# EAGLE board PCB Telemetria 2020 (EAGLE 9.5.2)
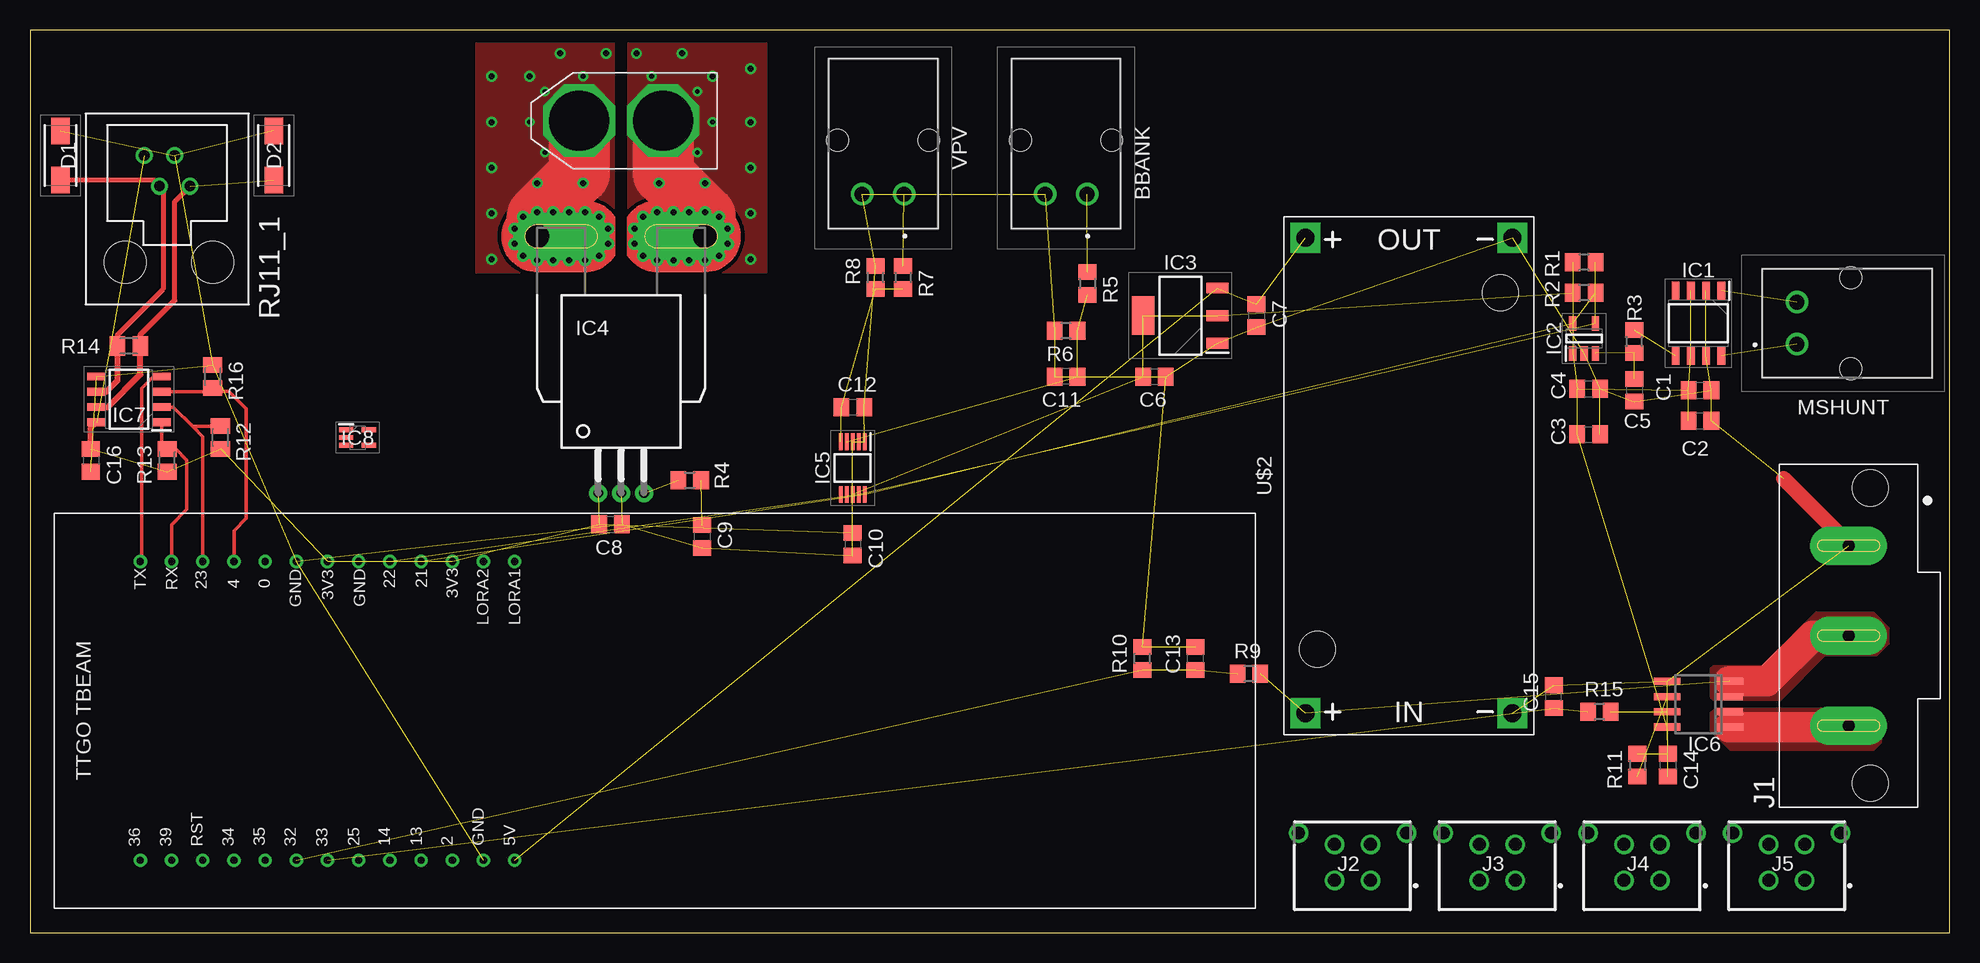
[diagram p0: board, top side]
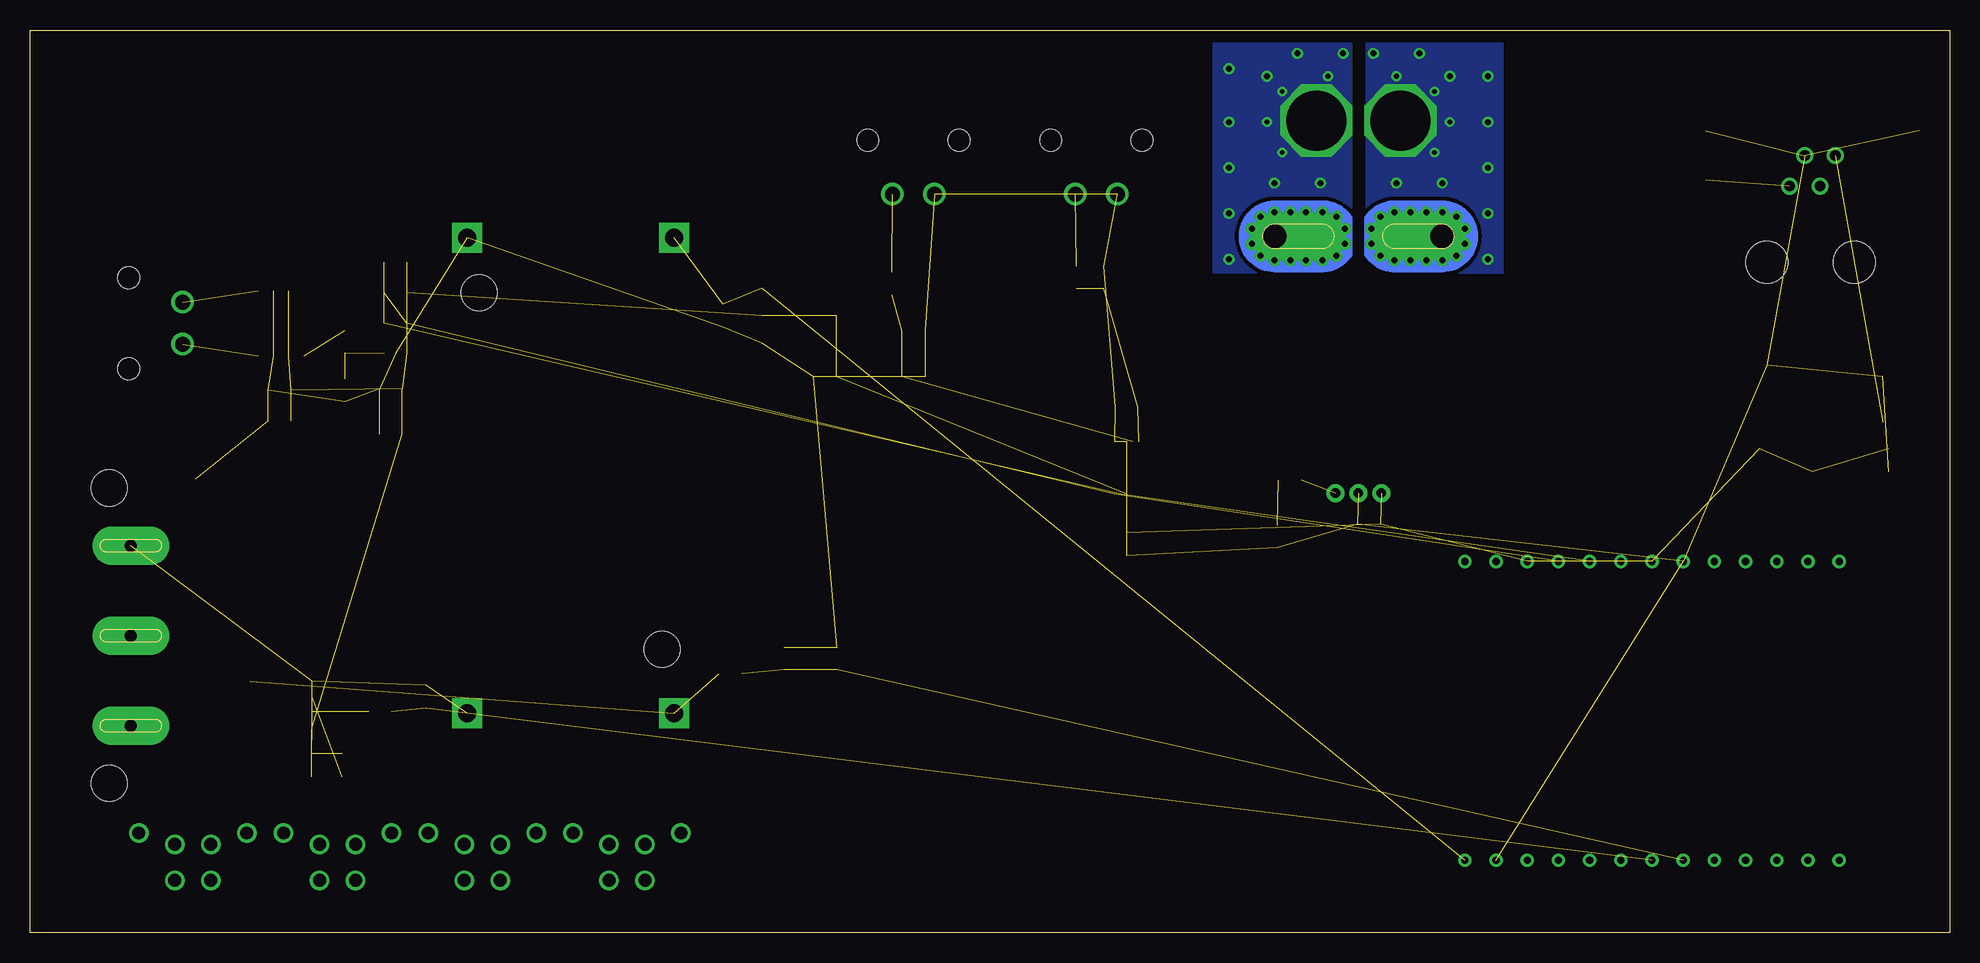
[diagram p1: board, bottom side, seen from below]

Size 160 x 75.23 mm. Coordinates in mm from the lower left corner, seen from the top.
Outline: 0,0 160,0 160,75.23 0,75.23 0,0
Copper layers (1*16): Top 0.035mm / dielectric 1.5mm / Bottom 0.035mm
Design rules "default *": minimum track width 6mil, minimum drill 0.35mm, track to track 12mil, track to pad 16mil, pad to pad 5mil, via to via 16mil, smd to smd 6mil, copper to edge 40mil, drill to drill 6mil, minimum pad ring 10mil, minimum via ring 8mil, stop-mask expansion 4mil, vias tented up to drill 0mil, thermal gap 10mil

## Footprints (pad centres in the part's own frame; a part is rotated, then mirrored left to right if it is on the bottom)
0532590229 = drill 1.25 pad 1.875: 1 -1.75,3.85; 2 1.75,3.85 | hole 1.8: 3.8,-0.65; -3.8,-0.65
C0805 = smd 1.3 x 1.5: 1 -0.95,0; 2 0.95,0
DIONM5026X229N = smd 2.2 x 1.55: 1 -2.05,0; 2 2.05,0
SOIC127P600X175-8N = smd 1.528 x 0.65: 1 -2.711,1.905; 2 -2.711,0.635; 3 -2.711,-0.635; 4 -2.711,-1.905; 5 2.711,-1.905; 6 2.711,-0.635; 7 2.711,0.635; 8 2.711,1.905
SOT95P280X145-5N = smd 1.2 x 0.6: 1 -1.25,0.95; 2 -1.25,0; 3 -1.25,-0.95; 4 1.25,-0.95; 5 1.25,0.95
SOT230P700X170-4N = smd 1.85 x 0.9: 1 -3.1,2.3; 2 -3.1,0; 3 -3.1,-2.3 | smd 1.85 x 3.2: 4 3.1,0
CB-PFF = drill 0.8 pad 1.5: 1 -1.91,-21.4; 2 0,-21.4; 3 1.91,-21.4 | drill 2 pad 4 offset: IP+ 7,0; IP- -7,0 | drill 0.5 pad 0.9: IP+@2 8.89,0.635; IP+@3 8.89,-0.635; IP+@4 8.175,-1.625; IP+@5 7,-2; IP+@6 5.675,-2; IP+@7 4.35,-2; IP+@8 3,-2; IP+@9 1.825,-1.625; IP+@10 1.1,-0.625; IP+@11 1.1,0.625; IP+@12 1.825,1.625; IP+@13 3,2; IP+@14 4.35,2; IP+@15 5.675,2; IP+@16 7,2; IP+@17 8.175,1.625; IP-@2 -8.89,0.635; IP-@3 -8.89,-0.635; IP-@4 -8.175,-1.625; IP-@5 -7,-2; IP-@6 -5.675,-2; IP-@7 -4.325,-2; IP-@8 -3,-2; IP-@9 -1.825,-1.625; IP-@10 -1.1,-0.625; IP-@11 -1.1,0.625; IP-@12 -1.825,1.625; IP-@13 -3,2; IP-@14 -4.325,2; IP-@15 -5.675,2; IP-@16 -7,2; IP-@17 -8.175,1.625
SOP50P490X110-10N = smd 1.4 x 0.3: 1 -2.2,1; 2 -2.2,0.5; 3 -2.2,0; 4 -2.2,-0.5; 5 -2.2,-1; 6 2.2,-1; 7 2.2,-0.5; 8 2.2,0; 9 2.2,0.5; 10 2.2,1
SOIC8 = smd 0.6 x 2.2: 1 -1.905,-2.6; 2 -0.635,-2.6; 3 0.635,-2.6; 4 1.905,-2.6; 5 1.905,2.6; 6 0.635,2.6; 7 -0.635,2.6; 8 -1.905,2.6
SOT65P210X110-5N = smd 1.2 x 0.4: 1 -0.95,0.65; 2 -0.95,0; 3 -0.95,-0.65; 4 0.95,-0.65; 5 0.95,0.65
MOLEX_172042-0406 = drill 1 pad 3.2 long: 1 7.508,2.075; 2 0,2.075; 3 -7.508,2.075 | hole 3: 12.298,0.27; -12.298,0.27
43045-0412 = drill 1.07 pad 1.62: 1 6.325,2.47; 2 3.325,2.47; 3 6.325,5.47; 4 3.325,5.47; 5 0.325,6.41; 6 9.325,6.41
R0805 = smd 1.3 x 1.5: 1 -0.95,0; 2 0.95,0
M0805 = smd 1.3 x 1.6: 1 -0.95,0; 2 0.95,0
TFC44 = drill 0.9: P$1 -1.905,4.45; P$2 -0.635,1.905; P$3 0.635,4.45; P$4 1.905,1.905 | hole 3.5: -3.5,-4.445; 3.8,-4.445
TTGOBEAM = drill 0.6: 0 11.9,5.8; 2 -13,-9.8; 3.3V 11.9,-9.8; 3V3 11.9,0.6; 4 11.9,8.4; 5V -13,-15; 13 -13,-7.2; 14 -13,-4.6; 21 11.9,-7.2; 22 11.9,-4.6; 23 11.9,11; 25 -13,-2; 32 -13,3.2; 33 -13,0.6; 34 -13,8.4; 35 -13,5.8; 36 -13,16.2; 39 -13,13.6; GND -13,-12.4; GND1 11.9,-2; GND3 11.9,3.2; LORA1 11.9,-15; LORA2 11.9,-12.4; RST -13,11; RX 11.9,13.6; TX 11.9,16.2
DC-DC-STEP-DOWN-LM2596 = drill 1.5 pad 2.5 square: IN+ -19.812,8.636; IN- -19.812,-8.636; OUT+ 19.812,8.636; OUT- 19.812,-8.636 | hole 3: -14.478,7.62; 15.24,-7.62
XT60 = drill 5 octagon: + 4.5,0; - 11.5,0

## Placement (x,y rotation side)
BBANK  53259-0229  [0532590229]  86.36,65.41 180 top
C1  100nF  [C0805]  139.19,45.21 0 top
C2  10nF  [C0805]  139.19,42.67 0 top
C3  10uF  [C0805]  129.92,41.53 0 top
C4  100nF  [C0805]  129.92,45.34 0 top
C5  100nF  [C0805]  133.73,45.21 270 top
C6  22uF  [C0805]  93.73,46.35 0 top
C7  22uF  [C0805]  102.23,51.44 270 top
C8  100nF  [C0805]  48.39,34.04 0 top
C9  100nF  [C0805]  56.01,33.02 270 top
C10  100nF  [C0805]  68.58,32.38 270 top
C11  1nF  [C0805]  86.36,46.35 180 top
C12  [C0805]  68.58,43.81 0 top
C13  1nF  [C0805]  97.16,22.86 90 top
C14  100nF  [C0805]  136.53,13.97 270 top
C15  100nF  [C0805]  127,19.68 90 top
C16  100nF  [C0805]  5.08,39.37 270 top
D1  SMAJ30CA  [DIONM5026X229N]  2.54,64.77 90 top
D2  SMAJ30CA  [DIONM5026X229N]  20.32,64.77 90 top
IC1  INA240A1DR  [SOIC127P600X175-8N]  139.06,50.8 270 top
IC2  MCP3221A6T-E_OTVAO  [SOT95P280X145-5N]  129.54,49.53 90 top
IC3  AZ1117IH-3.3TRG1  [SOT230P700X170-4N]  95.89,51.44 180 top
IC4  ACS758LCB-050B-PFF-T  [CB-PFF]  49.28,58.04 0 top
IC5  ADS1115IDGSR  [SOP50P490X110-10N]  68.58,38.73 270 top
IC6  ACS712-030B3  [SOIC8]  139.06,19.05 90 top
IC7  THVD2410DR  [SOIC127P600X175-8N]  8.26,44.45 180 top
IC8  TMP235AEDCKRQ1  [SOT65P210X110-5N]  27.3,41.27 0 top
J1  172042-0406  [MOLEX_172042-0406]  153.67,24.77 90 top
J2  43045-0412  [43045-0412]  105.41,1.91 0 top
J3  43045-0412  [43045-0412]  117.47,1.91 0 top
J4  43045-0412  [43045-0412]  129.54,1.91 0 top
J5  43045-0412  [43045-0412]  141.6,1.91 0 top
MSHUNT  53259-0229  [0532590229]  151.13,50.8 90 top
R1  [R0805]  129.54,55.88 180 top
R2  [R0805]  129.54,53.34 180 top
R3  680R  [R0805]  133.73,49.28 90 top
R4  4.7k  [R0805]  54.99,37.72 0 top
R5  220k  [R0805]  88.14,54.1 270 top
R6  13.3k  [R0805]  86.36,50.16 180 top
R7  [R0805]  72.77,54.61 270 top
R8  [R0805]  70.48,54.61 90 top
R9  16k  [R0805]  101.6,21.59 180 top
R10  4.7k  [R0805]  92.71,22.86 90 top
R11  4.7k  [R0805]  133.99,13.97 270 top
R12  10k  [M0805]  15.88,41.27 270 top
R13  10k  [M0805]  11.43,39.37 270 top
R14  120R  [M0805]  8.26,48.9 0 top
R15  1.6k  [R0805]  130.81,18.41 180 top
R16  10k  [M0805]  15.24,46.35 270 top
RJ11_1  TFC44  [TFC44]  11.43,60.33 0 top
U$1  TTGOBEAM  [TTGOBEAM]  25.4,19.05 90 top
U$2  DC-DC-STEP-DOWN-LM2596  [DC-DC-STEP-DOWN-LM2596]  114.94,38.1 90 top
U$3  XT60  [XT60]  57.28,67.69 180 top
VPV  53259-0229  [0532590229]  71.12,65.41 180 top

## Library data of the parts
BBANK MSHUNT VPV = CON_MOLEX_53259-0229; DESCRIPTION: Headers & Wire Housings 3.5 WtB Wafer Assy R B Wafer Assy RA 2Ckt; HEIGHT: 7mm; MANUFACTURER_NAME: Molex; MANUFACTURER_PART_NUMBER: 53259-0229; MOUSER_PART_NUMBER: 538-53259-0229; MOUSER_PRICE-STOCK: https://www.mouser.co.uk/ProductDetail/Molex/53259-0229?qs=%2Fy5FSpUmAiGN4PmFvaThpA%3D%3D
C1-C16 = rcl; SPICEPREFIX: C
D1 D2 = SamacSys_Parts; DESCRIPTION: Littelfuse SMAJ30CA, Bi-Directional TVS Diode, 400W, 2-Pin DO-214AC; HEIGHT: 2.29mm; MANUFACTURER_NAME: LITTELFUSE; MANUFACTURER_PART_NUMBER: SMAJ30CA; MOUSER_PART_NUMBER: 576-SMAJ30CA; MOUSER_PRICE-STOCK: https://www.mouser.co.uk/ProductDetail/Littelfuse/SMAJ30CA?qs=HR2RnyOI4E7JQai5qAA1IA%3D%3D
IC1 = INA240A1DR; DESCRIPTION: 80V, Low-/High-Side, Bi-Directional, Zero-Drift, Current Sense Amp w/Enhanced PWM Rejection; HEIGHT: 1.75mm; MANUFACTURER_NAME: Texas Instruments; MANUFACTURER_PART_NUMBER: INA240A1DR; MOUSER_PART_NUMBER: 595-INA240A1DR; MOUSER_PRICE-STOCK: https://www.mouser.co.uk/ProductDetail/Texas-Instruments/INA240A1DR?qs=AQlKX63v8Rv7XB07RTzuHA%3D%3D
IC2 = MCP3221A6T-E_OTVAO; DESCRIPTION: Analog to Digital Converters - ADC Automotive, 12-bit SAR ADC, I2C, single channel; HEIGHT: 1.45mm; MANUFACTURER_NAME: Microchip; MANUFACTURER_PART_NUMBER: MCP3221A6T-E/OTVAO; MOUSER_PART_NUMBER: 579-MCP3221A6TEOTVAO; MOUSER_PRICE-STOCK: https://www.mouser.co.uk/ProductDetail/Microchip-Technology/MCP3221A6T-E-OTVAO?qs=5aG0NVq1C4xIe7K3D%2FHE6g%3D%3D
IC3 = AZ1117IH-3.3TRG1; DESCRIPTION: LDO Voltage Regulators LDO BJT HiCurr 1.35A 10Hz to 10KHz; HEIGHT: 1.7mm; MANUFACTURER_NAME: Diodes Inc.; MANUFACTURER_PART_NUMBER: AZ1117IH-3.3TRG1; MOUSER_PART_NUMBER: 621-AZ1117IH-3.3TRG1; MOUSER_PRICE-STOCK: https://www.mouser.co.uk/ProductDetail/Diodes-Incorporated/AZ1117IH-33TRG1?qs=cpo3%2FpBou2jnS4SxLgAVoA%3D%3D
IC4 = allegro; MPN: ACS758LCB-050B-PFF-T; OC_FARNELL: 1718997; OC_NEWARK: 04R7131
IC5 = SamacSys_Parts; DESCRIPTION: 16-Bit 860SPS 4-Ch Delta-Sigma ADC With PGA, Oscillator, Vref, Comparator, and I2C; HEIGHT: 1.1mm; MANUFACTURER_NAME: Texas Instruments; MANUFACTURER_PART_NUMBER: ADS1115IDGSR; MOUSER_PART_NUMBER: 595-ADS1115IDGSR; MOUSER_PRICE-STOCK: https://www.mouser.co.uk/ProductDetail/Texas-Instruments/ADS1115IDGSR?qs=IK5e5L0zOXjKCJoVMhYO%2FQ%3D%3D
IC6 = allegro-2
IC7 = SamacSys_Parts; DESCRIPTION: RS-485 Interface IC; HEIGHT: 1.75mm; MANUFACTURER_NAME: Texas Instruments; MANUFACTURER_PART_NUMBER: THVD2410DR; MOUSER_PART_NUMBER: 595-THVD2410DR; MOUSER_PRICE-STOCK: https://www.mouser.co.uk/ProductDetail/Texas-Instruments/THVD2410DR?qs=%252B6g0mu59x7L2L8jrQVCEYQ%3D%3D
IC8 = SamacSys_Parts; DESCRIPTION: Board Mount Temperature Sensors Automotive grade, +/-0.5C analog output temperature sensor with 10 mV/C gain 5-SC70 -40 to 150; HEIGHT: 1.1mm; MANUFACTURER_NAME: Texas Instruments; MANUFACTURER_PART_NUMBER: TMP235AEDCKRQ1; MOUSER_PART_NUMBER: 595-TMP235AEDCKRQ1; MOUSER_PRICE-STOCK: https://www.mouser.co.uk/ProductDetail/Texas-Instruments/TMP235AEDCKRQ1?qs=T3oQrply3y86j8c6PmMwyA%3D%3D
J1 = 172042-0302; AVAILABILITY: Warning; DESCRIPTION: 3 Position Header, Male Blades Connector Solder 0.295 (7.50mm) Through Hole; MF: Molex; MP: 172042-0302; PACKAGE: None; PRICE: None
J2-J5 = SamacSys_Parts; DESCRIPTION: Headers & Wire Housings 4 CKT VERT HEADER; HEIGHT: mm; MANUFACTURER_NAME: Molex; MANUFACTURER_PART_NUMBER: 43045-0412; MOUSER_PART_NUMBER: 538-43045-0412; MOUSER_PRICE-STOCK: https://www.mouser.co.uk/ProductDetail/Molex/43045-0412?qs=UeCeOHRHQebPBbEMDLocEw%3D%3D
R1-R16 = rcl; SPICEPREFIX: R
RJ11_1 = Painel-Facilidades
U$1 = bibliotecattgo
U$2 = diy-modules
U$3 = XT60

## Nets
12V_CURRENT_M: IC6.1 IC6.2 J1.3
!RXEN: IC7.2 R12.1 U$1.23
ADC1_4: C13.1 R9.2 R10.1 U$1.32
ADC1_5: C15.1 R15.2 U$1.33
AIN2: IC5.6
AIN3: IC5.7
BBANK_AIN0: C11.1 IC5.4 R5.2 R6.1
CMPPT_F: C9.1 R4.2
CMPPT_M: IC4.IP- IC4.IP-@2 IC4.IP-@3 IC4.IP-@4 IC4.IP-@5 IC4.IP-@6 IC4.IP-@7 IC4.IP-@8 IC4.IP-@9 IC4.IP-@10 IC4.IP-@11 IC4.IP-@12 IC4.IP-@13 IC4.IP-@14 IC4.IP-@15 IC4.IP-@16 IC4.IP-@17 U$3.-
CMPPT_OUT: IC4.3 R4.1
CMPPT_P: IC4.IP+ IC4.IP+@2 IC4.IP+@3 IC4.IP+@4 IC4.IP+@5 IC4.IP+@6 IC4.IP+@7 IC4.IP+@8 IC4.IP+@9 IC4.IP+@10 IC4.IP+@11 IC4.IP+@12 IC4.IP+@13 IC4.IP+@14 IC4.IP+@15 IC4.IP+@16 IC4.IP+@17 U$3.+
CONEX_11: U$1.36
CONEX_12: U$1.39
CONEX_21: U$1.34
CONEX_22: U$1.35
CONEX_31: U$1.25
CONEX_32: U$1.0
GND: BBANK.2 C1.2 C2.2 C3.2 C4.2 C5.2 C6.2 C7.2 C8.2 C9.2 C10.2 C11.2 C12.2 C13.2 C14.2 C15.2 C16.2 D1.2 D2.2 IC1.2 IC1.7 IC2.2 IC3.1 IC4.2 IC5.1 IC5.3 IC6.5 IC7.5 J1.1 R6.2 R8.2 R10.2 R16.1 RJ11_1.P$3 U$1.GND U$1.GND3 U$2.IN- U$2.OUT- VPV.2
I2C_SCL: IC2.5 IC5.10 R2.1 U$1.21
I2C_SDA: IC2.4 IC5.9 R1.1 U$1.22
MSHUNT_ADC: C5.1 IC2.3 R3.1
MSHUNT_AMP: IC1.5 R3.2
MSHUNT_B: IC1.8 MSHUNT.1
MSHUNT_M: IC1.1 MSHUNT.2
N$1: IC6.6 R11.2
N$2: IC6.7 R15.1
N$9: D1.1 IC7.6 R14.1 RJ11_1.P$2
N$11: U$1.14
N$12: U$1.13
N$13: U$1.2
N$14: D2.1 IC7.7 R14.2 RJ11_1.P$4
N$23: U$1.GND1
N$27: U$1.LORA2
N$28: U$1.LORA1
PV_AIN1: C12.1 IC5.5 R7.2 R8.1
RST: U$1.RST
TXEN: IC7.3 R16.2 U$1.4
UART_RX: IC7.1 R13.1 U$1.RX
UART_TX: IC7.4 U$1.TX
VCC_3V3: C1.1 C2.1 C3.1 C4.1 C6.1 C8.1 C10.1 C14.1 C16.1 IC1.3 IC1.6 IC2.1 IC3.2 IC3.4 IC4.1 IC5.8 IC6.8 IC7.8 R1.2 R2.2 R11.1 R12.2 R13.2 RJ11_1.P$1 U$1.3.3V U$1.3V3
VCC_5V: C7.1 IC3.3 U$1.5V U$2.OUT+
VCC_12V: IC6.3 IC6.4 J1.2 R9.1 U$2.IN+
VCC_BBANK: BBANK.1 R5.1
VCC_PV: R7.1 VPV.1

## Tracks (layer width: path | path; a pad name or v marks a point on that pad's centre or on a via)
12V_CURRENT_M
  Top 0.406: IC6.2 IC6.1
  Top 2.54: J1.3 151.48,17.14 IC6.1
  pour Top (no thermals): 140.08,18.29 140.08,16.89 141.73,15.24 153.67,15.24 154.31,15.88 154.31,17.78 153.42,18.67 140.46,18.67
!RXEN
  Top 0.305: U$1.23 14.4,41.35 13.59,42.16 | 13.59,42.16 11.94,43.81 IC7.2 | R12.1 13.65,42.23 13.59,42.16
ADC1_4  (3 unrouted)
ADC1_5  (2 unrouted)
BBANK_AIN0  (3 unrouted)
CMPPT_F  (1 unrouted)
CMPPT_M  (via drill 0.4 pad 0.55, 0.5 pad 0.75)
  Top 5.08: IC4.IP- 42.28,59.74 45.78,63.25 U$3.-
  other vias: 38.48,56.13 38.48,59.94 38.48,63.75 38.48,67.56 38.48,71.37 42.29,62.48 46.1,62.48 41.66,71.37 44.2,73.28 48.01,73.28 46.1,71.37 42.93,70.1 41.66,67.56 42.93,65.02
  pour Top (no thermals): 37.21,54.99 37.21,74.17 48.64,74.17 48.64,54.99
  pour Bottom (no thermals): 37.21,54.99 37.21,74.17 48.64,74.17 48.64,54.99
CMPPT_OUT  (1 unrouted)
CMPPT_P  (via drill 0.4 pad 0.55, 0.5 pad 0.75)
  Top 5.08: U$3.+ 52.78,63.25 56.28,59.75 IC4.IP+
  other vias: 52.45,62.48 60.07,56.13 60.07,59.94 60.07,63.75 56.26,62.48 60.07,67.56 60.07,72.01 56.9,71.37 54.36,73.28 50.55,73.28 55.63,65.02 56.9,67.56 55.63,70.1 51.82,71.37
  pour Top (no thermals): 61.34,74.17 61.34,54.99 49.91,54.99 49.91,74.17
  pour Bottom (no thermals): 49.91,74.17 49.91,54.99 61.34,54.99 61.34,74.17
GND  (38 unrouted)
  Top 1.27: J1.1 151.59,32.43 146.18,37.85
I2C_SCL  (3 unrouted)
I2C_SDA  (3 unrouted)
MSHUNT_ADC  (2 unrouted)
MSHUNT_AMP  (1 unrouted)
MSHUNT_B  (1 unrouted)
MSHUNT_M  (1 unrouted)
N$1  (1 unrouted)
N$2  (1 unrouted)
N$9
  Top 0.406: R14.1 7.3,49.85 11.1,53.65 11.1,61.92 RJ11_1.P$2 10.3,62.72 D1.1
  Top 0.508: IC7.6 6.35,45.09 7.3,46.04 R14.1
N$14  (1 unrouted)
  Top 0.406: R14.2 9.21,49.84 12.06,52.7 12.06,60.96 RJ11_1.P$4
  Top 0.508: IC7.7 6.48,43.81 9.21,46.54 R14.2
PV_AIN1  (3 unrouted)
TXEN
  Top 0.305: U$1.4 17,33.51 18.03,34.54 18.03,43.69 16.57,45.15 15.49,45.15 | IC7.3 14.92,45.09 R16.2
  Top 0.508: 15.49,45.15 R16.2
UART_RX
  Top 0.305: U$1.RX 11.8,34.02 13.08,35.31 13.08,39.37 12.13,40.32 R13.1 10.97,40.78 IC7.1
UART_TX
  Top 0.305: 9.33,31.08 9.33,45.4 10.29,46.35 IC7.4
  Top 0.508: U$1.TX 9.33,31.08
VCC_3V3  (24 unrouted)
  Top 0.508: C16.1 5.08,42.08 IC7.8
VCC_5V  (3 unrouted)
VCC_12V  (2 unrouted)
  Top 0.406: IC6.3 IC6.4
  Top 2.54: IC6.4 144.78,20.95 148.59,24.77 J1.2
  pour Top (no thermals): 140.34,19.43 145.92,19.43 149.61,23.11 153.92,23.11 154.94,24.13 154.94,25.4 153.67,26.67 148.84,26.67 144.4,22.23 140.34,22.23 140.08,21.97 140.08,19.68
VCC_BBANK  (1 unrouted)
VCC_PV  (1 unrouted)